# Altium PCB PCB1.PcbDoc
Units mil, origin at the board's own origin, x right, y up, seen from the top; angles counter-clockwise.
Board outline 2765.94 x 1978.53 mil, 2 copper layers (Top Layer, Bottom Layer); 10 components, 24 nets, 74 pads, 3 vias.
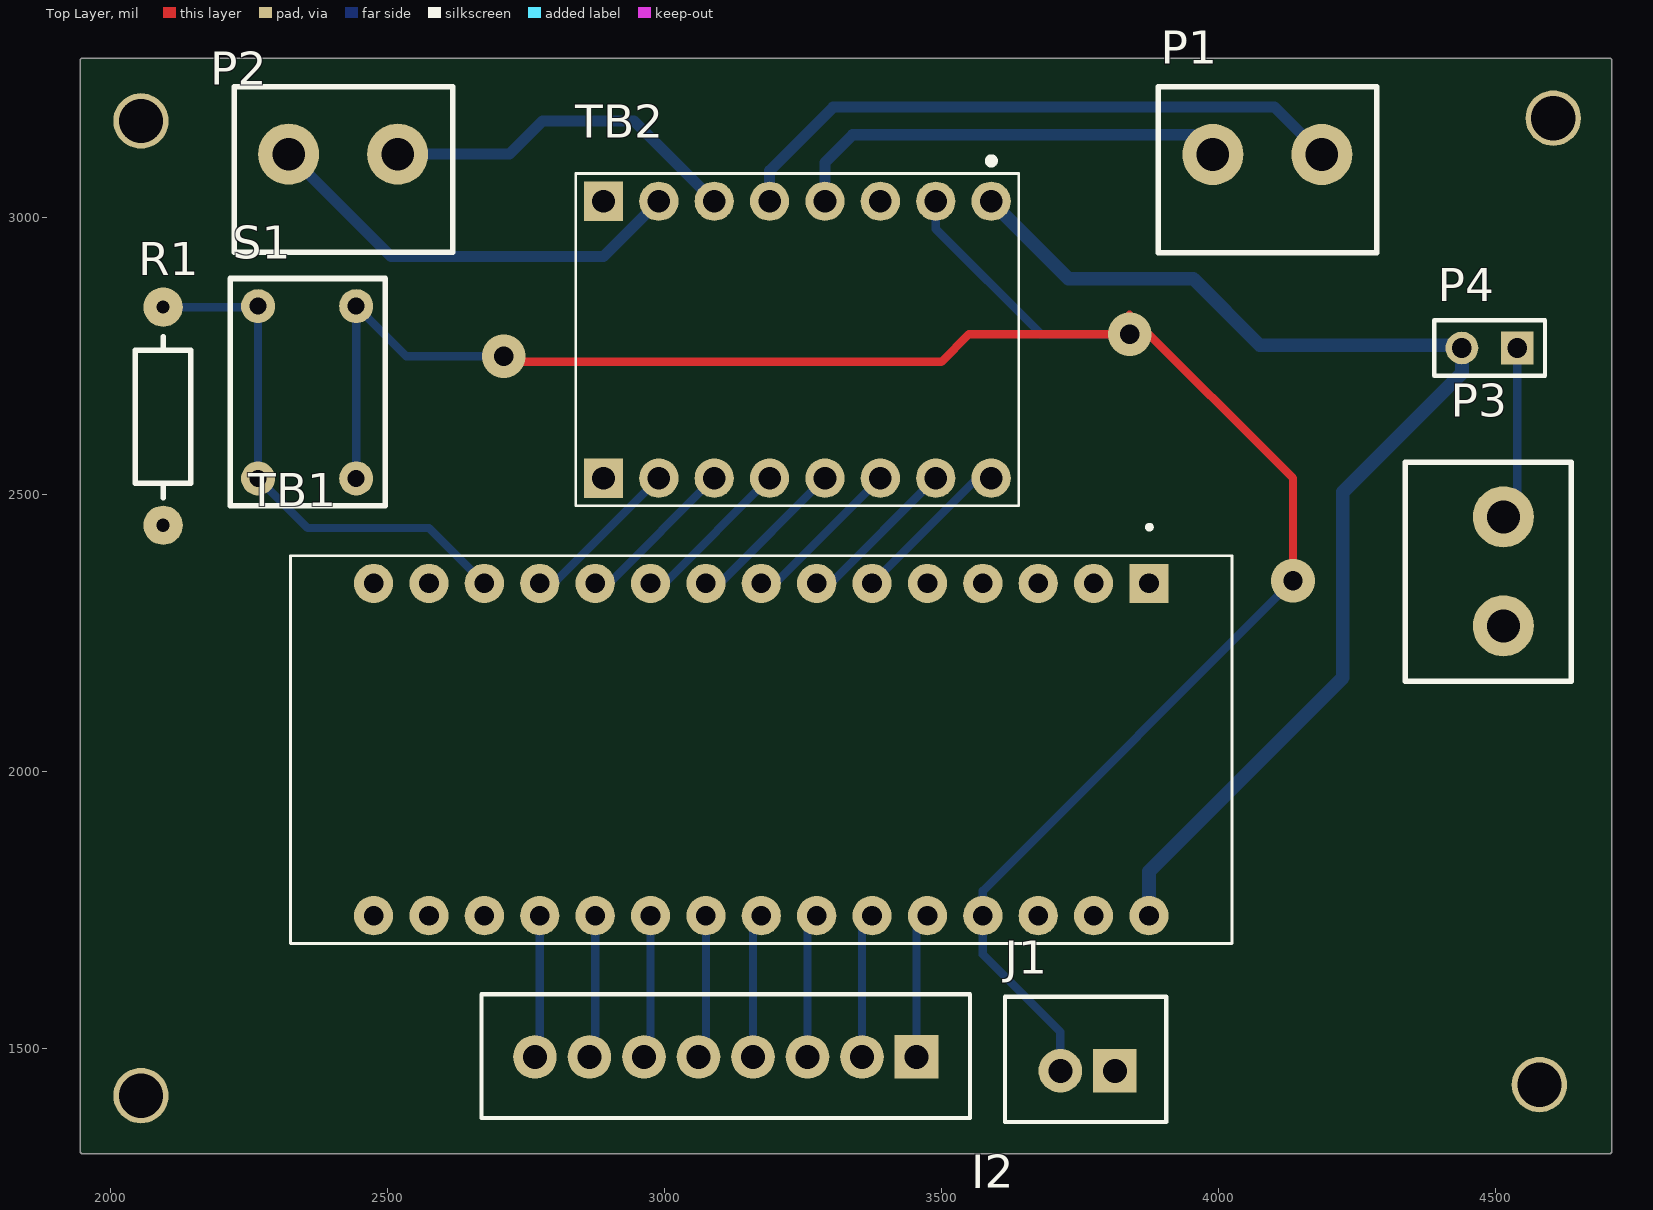
[diagram p0: Top Layer view]
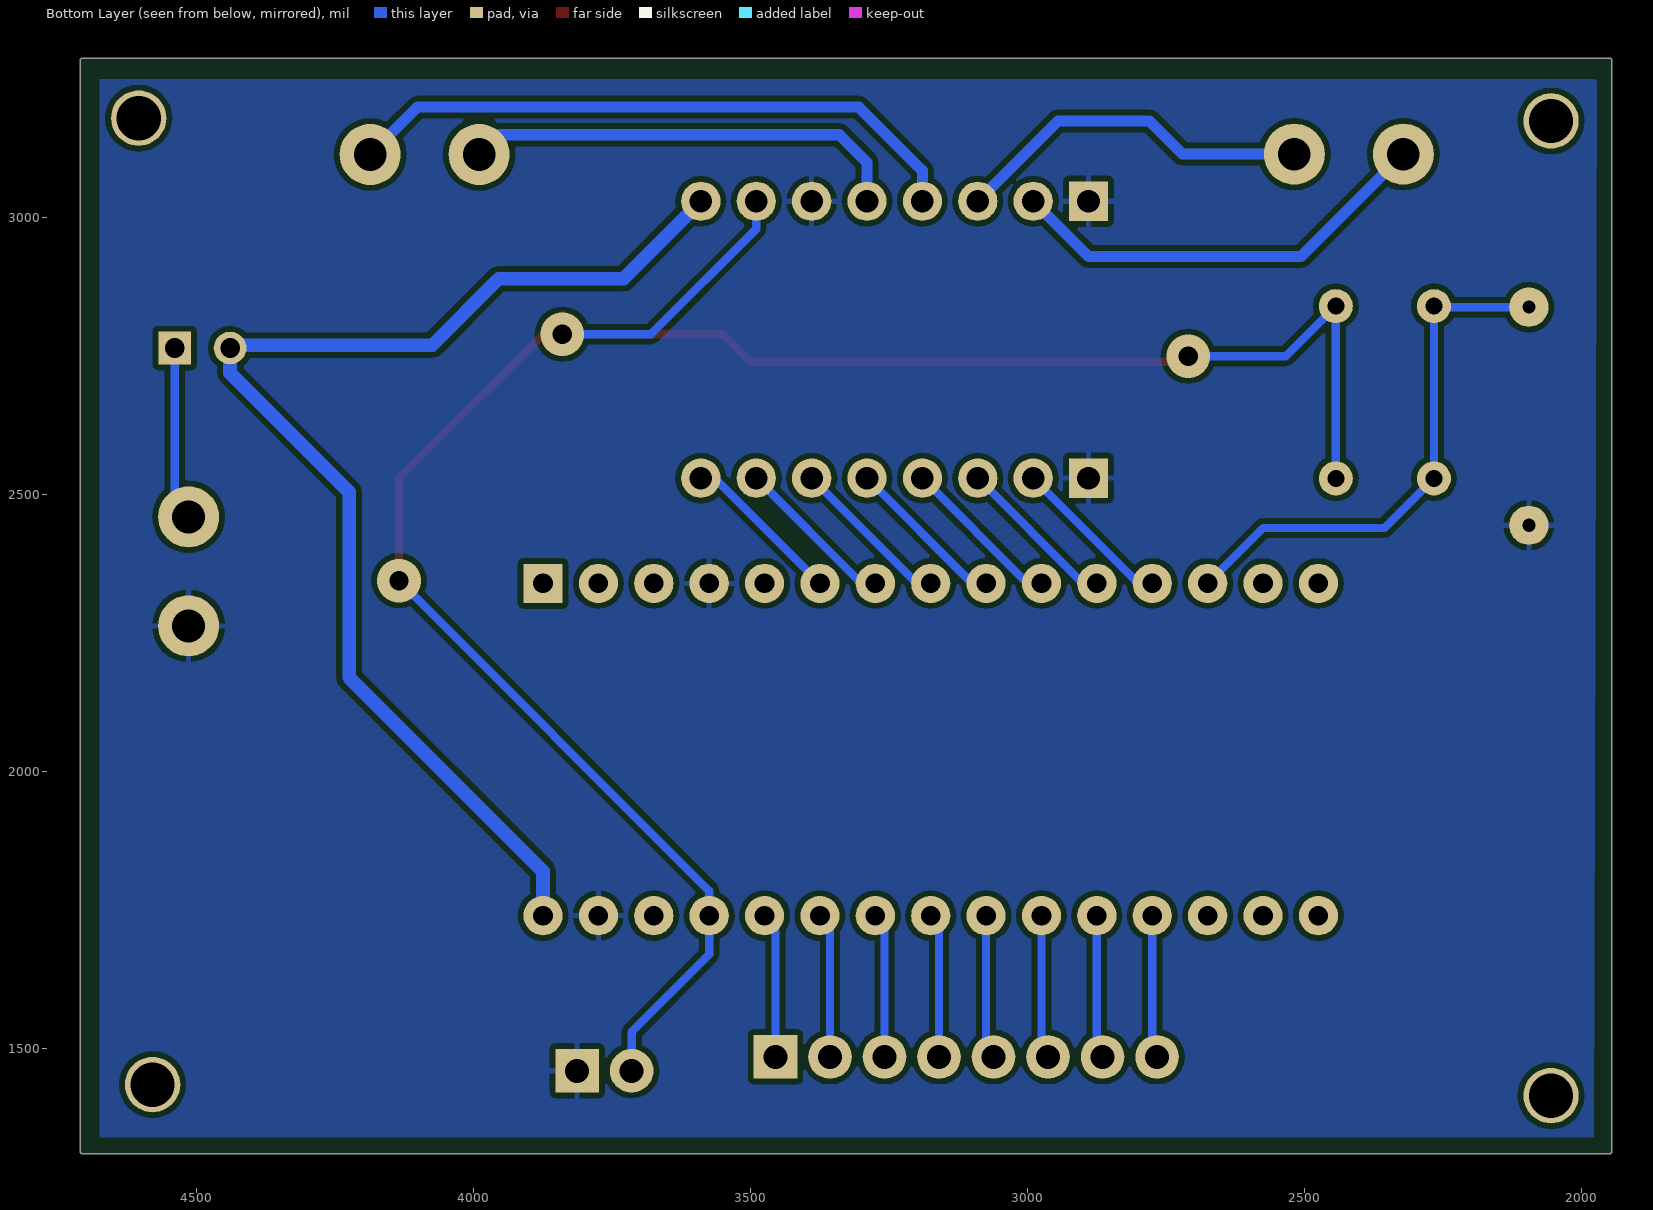
[diagram p1: Bottom Layer view, seen from below]
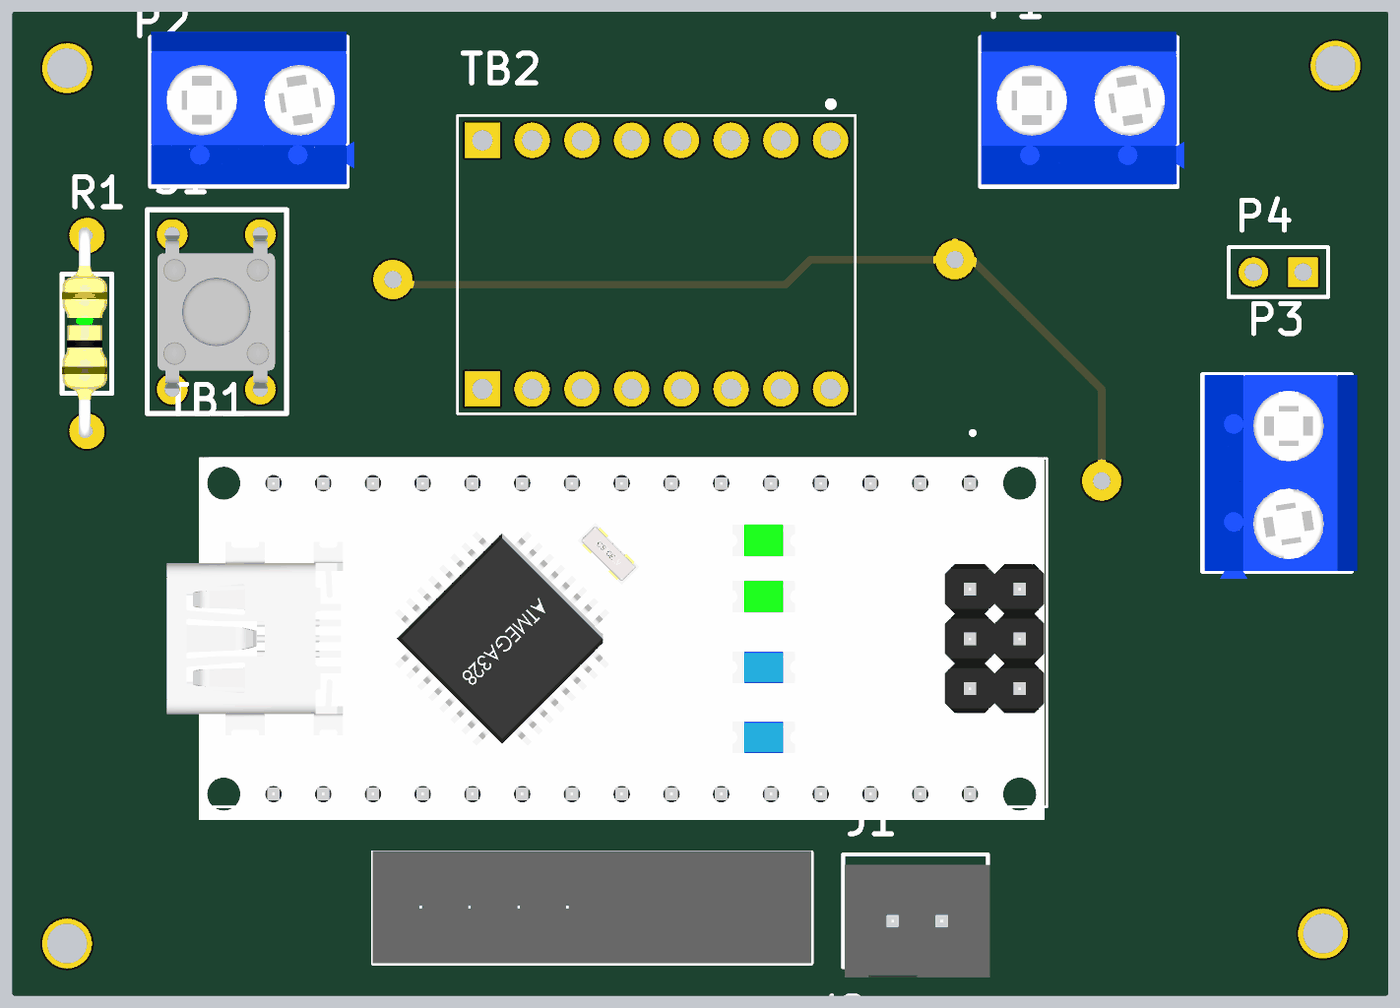
[diagram p2: 3D render of the assembled board from above, using the file's embedded part models]

## Layer stack, top to bottom
Top Solder: solder mask 0.4, Solder Resist, Dk 3.5
Top Layer: signal copper 1.4
Dielectric 1: dielectric 12.6, FR-4, Dk 4.8
Bottom Layer: signal copper 1.4
Bottom Solder: solder mask 0.4, Solder Resist, Dk 3.5

## Board outline
1944.98,1315 ccw(c1950,1315) 1950,1309.98 4705.91,1309.98 ccw(c4705.91,1315) 4710.92,1315 4710.92,3283.5 ccw(c4705.91,3283.5) 4705.91,3288.52 1950,3288.52 ccw(c1950,3283.5) 1944.98,3283.5

## Design rules (kind name [scope] priority, off if disabled: settings)
Clearance [All] p1: gap=10 ignorepadtopadclearanceinfootprint=FALSE except(0: Arc-Hole Track-Hole SMDPad-Hole THPad-Hole Via-Hole Fill-Hole Poly-Hole Region-Hole Text-Hole)
PolygonConnect [All] p1: connectstyle=Relief reliefconductorwidth=10 reliefentries=4 polygonreliefangle="90 Angle" airgapwidth=10
RoutingVias [All] p1: holewidth=28 width=50 viastyle="Through Hole" minholewidth=28 minwidth=50 maxholewidth=28 maxwidth=50
SolderMaskExpansion [All] p1: expansion=4
Width [All] p1: maxlimit=30 minlimit=10 preferedwidth=15
30 further rules are at their usual default settings.

## Components (designator, comment, footprint, x,y, rotation, side; value= is the part's Value field where it differs from the comment)
J1 "QTR_VCC_HEADER" SHDR2W64P0X250_1X2_740X575X700P 3715,1460 r0 top
J2 "B8B-XH-A(LF)(SN)" HDRV8W64P0X250_1X8_2240X575X700P 3455.28,1485 r0 top
P1 "MOTOR_1_HEADER" "KRE-2 CONNECTOR" 4088.65,3114.41 r0 top
P2 "MOTOR_2_HEADER" "KRE-2 CONNECTOR" 2420,3115 r0 top
P3 "VCC_IN_HEADER" "KRE-2 CONNECTOR" 4515,2361.57 r270 top
P4 "JUMPER_VCC" HDR1X2 4540,2765 r180 top
R1 "10K" "Axial 0.4(resistor)" 2095,2445 r90 top
S1 "Pushbutton switch" Pushbutton 2355,2685 r0 top
TB1 "ARDUINO_NANO" *SHIELD_ARDUINO_NANO 3175,2040 r270 top
TB2 "POLOLU-713" *SHIELD_POLOLU-713 3240,2780 r270 top

## Footprints (in the part's own frame and the unit in brackets; to place one, negate y for a bottom-side part, rotate by r counter-clockwise, add the part's x,y. Pads: shape width x height; smd on the part's side, far side on the other; paste and mask are expansions set on the pad)
*SHIELD_ARDUINO_NANO [mm]
  rect 1.8x1.8 hole 0.9: 1(-7.62,17.78)
  round 1.8 hole 0.9: 2(-7.62,15.24) 3(-7.62,12.7) 4(-7.62,10.16) 5(-7.62,7.62) 6(-7.62,5.08) 7(-7.62,2.54) 8(-7.62,0) 9(-7.62,-2.54) 10(-7.62,-5.08) 11(-7.62,-7.62) 12(-7.62,-10.16) 13(-7.62,-12.7) 14(-7.62,-15.24) 15(-7.62,-17.78) 16(7.62,-17.78) 17(7.62,-15.24) 18(7.62,-12.7) 19(7.62,-10.16) 20(7.62,-7.62) 21(7.62,-5.08) 22(7.62,-2.54) 23(7.62,0) 24(7.62,2.54) 25(7.62,5.08) 26(7.62,7.62) 27(7.62,10.16) 28(7.62,12.7) 29(7.62,15.24) 30(7.62,17.78)
  silkscreen extent -10.3,-21.59 8.89,21.59, body extent -8.97,-23.35 9.57,21.47, height 12.88
*SHIELD_POLOLU-713 [mm]
  round 1.8 hole 1.04: 1(-6.35,8.89) 2(-6.35,6.35) 3(-6.35,3.81) 4(-6.35,1.27) 5(-6.35,-1.27) 6(-6.35,-3.81) 7(-6.35,-6.35) 10(6.35,-6.35) 11(6.35,-3.81) 12(6.35,-1.27) 13(6.35,1.27) 14(6.35,3.81) 15(6.35,6.35) 16(6.35,8.89)
  rect 1.8x1.8 hole 1.04: 8(-6.35,-8.89) 9(6.35,-8.89)
  silkscreen extent -8.35,-10.16 7.62,10.16
"Axial 0.4(resistor)" [mm]
  round 1.8 hole 0.6: 1(0,0) 2(10,0)
  silkscreen extent 1.27,-1.27 8.64,1.27, body extent -0.36,-1.04 10.41,1.27, height 1.93
HDR1X2 [mm] "Connector; Header; 2 Position"
  rect 1.5x1.5 hole 0.9: 1(0,0)
  round 1.5 hole 0.9: 2(2.54,0)
  silkscreen extent -1.27,-1.27 3.81,1.27
HDRV8W64P0X250_1X8_2240X575X700P [mm]
  rect 2x2 hole 1.1: 1(0,0)
  round 2 hole 1.1: 2(-2.5,0) 3(-5,0) 4(-7.5,0) 5(-10,0) 6(-12.5,0) 7(-15,0) 8(-17.5,0)
  silkscreen extent -19.95,-2.8 2.45,2.88, body extent -19.96,-2.79 2.44,2.96, height 7
"KRE-2 CONNECTOR" [mm]
  round 2.8 hole 1.5: 1(-2.5,0) 2(2.5,0)
  silkscreen extent -5,-4.5 5.03,3.1, body extent -4.99,-4.41 5.41,3.39, height 11.82
Pushbutton [mm]
  round 1.562 hole 0.781: 1(-2.25,-3.95) 1(-2.25,3.95) 2(2.25,-3.95) 2(2.25,3.95)
  silkscreen extent -3.52,-5.19 3.59,5.22, body extent -3,-3.9 3,3.9, height 5
SHDR2W64P0X250_1X2_740X575X700P [mm]
  round 2 hole 1.1: 1(0,0)
  rect 2x2 hole 1.1: 2(2.5,0)
  silkscreen extent -2.54,-2.35 4.86,3.4, body extent -2.45,-2.88 4.95,2.88, height 7

## Part data
J1: library part B2B-XH-A(LF)(SN), "Connector", Manufacturer_Name="JST Sales America", Datasheet Link=http://www.jst-mfg.com/product/pdf/eng/eXH.pdf, Height=7mm, Manufacturer_Part_Number=B2B-XH-A(LF)(SN)
J2: "Connector", Manufacturer_Name="JST (JAPAN SOLDERLESS TERMINALS)", RS Part Number=8201576P, Datasheet Link=http://docs-emea.rs-online.com/webdocs/1357/0900766b81357f2f.pdf, Height=7mm, Manufacturer_Part_Number=B8B-XH-A(LF)(SN), RS Price/Stock=http://uk.rs-online.com/web/p/products/8201576P
P1 P2 P3: library part "KRE-2 CONNECTOR", "KRE _CONNECTOR"
P4: library part "Header 2", "Header, 2-Pin", LatestRevisionDate=17-Jul-2002, LatestRevisionNote="Re-released for DXP Platform.", Publisher="Altium Limited"
R1: library part "Resistor 10K", "RES 10K OHM 1/4W 5% AXIAL", Manufacturer=Yageo, eVendor=Digikey, eVendorPart#=10KQTR-ND, eVendorPrice=0.10000, MOQ=1, Part#=CFR-25JR-52-10K
TB1: "Dev.kit: Arduino; UART; ICSP, USB B mini, pin strips", Package=None, Availability=Unavailable, MF=Arduino, MP="ARDUINO NANO", Price=None, SnapEDA_Link=https://www.snapeda.com/parts/ARDUINO%20NANO/Arduino/view-part/?ref=snap
TB2: "DC-motor driver; IC: TB6612FNG; 100kHz; 1A; Uin mot: 4.5", Package=None, Availability=Unavailable, MF=Pololu, MP=POLOLU-713, Price=None, SnapEDA_Link=https://www.snapeda.com/parts/POLOLU-713/Pololu/view-part/?ref=snap
S1: eVendor=david, eVendorPart#=mota, eVendorPrice=deti

## Free pads (board coordinates)
  round 100 hole 80 unplated: 2(2055,1415) 2(2055,3175) 2(4580,1435) 2(4605,3180)

## Via types
v1: diameter 78.74, hole 35, Top Layer to Bottom Layer, 3 vias

## Nets (pads, with @x,y where several pads share a name; then routed paths per layer and width w, separated by ;. In a path a pad name is that pad's centre, name@x,y a point inside that pad or via, vN(x,y) a via of type N, cw(c..) or ccw(c..) an arc to the next point about the centre after c; other vN are vias at no path point)
A1: P1.1 TB2.4 | length 805.7
  Bottom Layer w20: TB2.4 3290,3100 3340,3150 3954.63,3150 P1.1
A2: P1.2 TB2.5 | length 1135.2
  Bottom Layer w20: TB2.5 3190,3085 3305,3200 4101.48,3200 P1.2
ALIM: P4.2 TB1.30 TB2.1 | length 2223.8
  Bottom Layer w25: TB2.1@3590,3025 TB2.1 3730,2890 3955,2890 4075,2770 4435,2770 P4.2 4440,2720 4225,2505 4225,2170 3875,1820 TB1.30
B1: P2.1 TB2.7 | length 786.5
  Bottom Layer w20: P2.1 2506.57,2930 2890,2930 TB2.7
B2: P2.2 TB2.6 | length 656.5
  Bottom Layer w20: P2.2 2720,3115 2780,3175 2945,3175 TB2.6
Button_SET: R1.2 S1.1 TB1.13 | length 970.3
  Bottom Layer w15: R1.2 2264.61,2838.7 2266.42,2840.51 2266.42,2529.49 2355.91,2440 2575,2440 TB1.13
GND: J1.2 P3.2 R1.1 TB1.4 TB1.29 TB2.3 TB2.8 TB2.9
NetJ2_1: J2.1 TB1.26 | length 263.2
  Bottom Layer w15: J2.1 3455.28,1720.28 TB1.26
NetJ2_2: J2.2 TB1.25 | length 262.5
  Bottom Layer w15: J2.2 3356.85,1721.85 TB1.25
NetJ2_3: J2.3 TB1.24 | length 261.9
  Bottom Layer w15: J2.3 3258.43,1723.43 TB1.24
NetJ2_4: J2.4 TB1.23 | length 261.2
  Bottom Layer w15: J2.4 3160,1725 TB1.23
NetJ2_5: J2.5 TB1.22 | length 260.6
  Bottom Layer w15: J2.5 3075,1498.43 TB1.22
NetJ2_6: J2.6 TB1.21 | length 259.9
  Bottom Layer w15: J2.6 2975,1496.85 TB1.21
NetJ2_7: J2.7 TB1.20 | length 259.3
  Bottom Layer w15: J2.7 2875,1495.28 TB1.20
NetJ2_8: J2.8 TB1.19 | length 258.6
  Bottom Layer w15: J2.8 2775,1493.7 TB1.19
PIN_6: TB1.6 TB2.16 | length 313.7
  Bottom Layer w15: TB1.6@3375,2360 TB1.6 3565,2530 TB2.16
PIN_7: TB1.7 TB2.15 | length 318.7
  Bottom Layer w15: TB1.7@3275,2365 TB1.7 3300,2340 TB2.15
PIN_8: TB1.8 TB2.14 | length 293.7
  Bottom Layer w15: TB1.8 3200,2340 TB2.14
PIN_9: TB1.9 TB2.13 | length 293.7
  Bottom Layer w15: TB1.9 3100,2340 TB2.13
PIN_10: TB1.10 TB2.12 | length 293.7
  Bottom Layer w15: TB1.10 3000,2340 TB2.12
PIN_11: TB1.11 TB2.11 | length 293.7
  Bottom Layer w15: TB1.11 2900,2340 TB2.11
PIN_12: TB1.12 TB2.10 | length 293.7
  Bottom Layer w15: TB1.12 2800,2340 TB2.10
PIN_27: J1.1 S1.2 TB1.27 TB2.2 | length 4060.6
  Top Layer w15: v1(2710,2750) 2720,2740 3500,2740 3550,2790 v1(3840,2790) 3840,2825 4135,2530 v1(4135,2345)
  Bottom Layer w15: S1.2@2443.58,2529.49 2443.58,2840.51 2534.09,2750 v1(2710,2750) ; TB2.2 3490,2980 3680,2790 v1(3840,2790) ; J1.1 3715,1530 3575,1670 TB1.27 3575,1785 v1(4135,2345)
VIN: P3.1 P4.1 | length 335.1
  Bottom Layer w15: P3.1@4493.79,2481.21 4502.57,2490 4527.43,2490 4536.21,2481.21 4540,2485 P4.1
pads on no net: TB1.1 TB1.2 TB1.3 TB1.5 TB1.14 TB1.15 TB1.16 TB1.17 TB1.18 TB1.28

## Polygon pours and split planes (outlines as drawn)
GND on Bottom Layer "Bottom Layer-No Net" (solid, remove dead copper, pour order 2): 1972.55,3250 4675,3250 4675,1340 1977.5,1340

## Silkscreen, mask and mechanical layers (free items; w line width, h text height)
Mechanical 1:
  lines w10: 1950,1315 1950,3283.5 4705.91,3283.5 4705.91,1315 1950,1315